# Altium PCB PCB1.PcbDoc
Units mm, origin at the board's own origin, x right, y up, seen from the top; angles counter-clockwise.
Board outline 95 x 95 mm, 2 copper layers (Top Layer, Bottom Layer); 53 components, 47 nets, 183 pads, 32 vias.
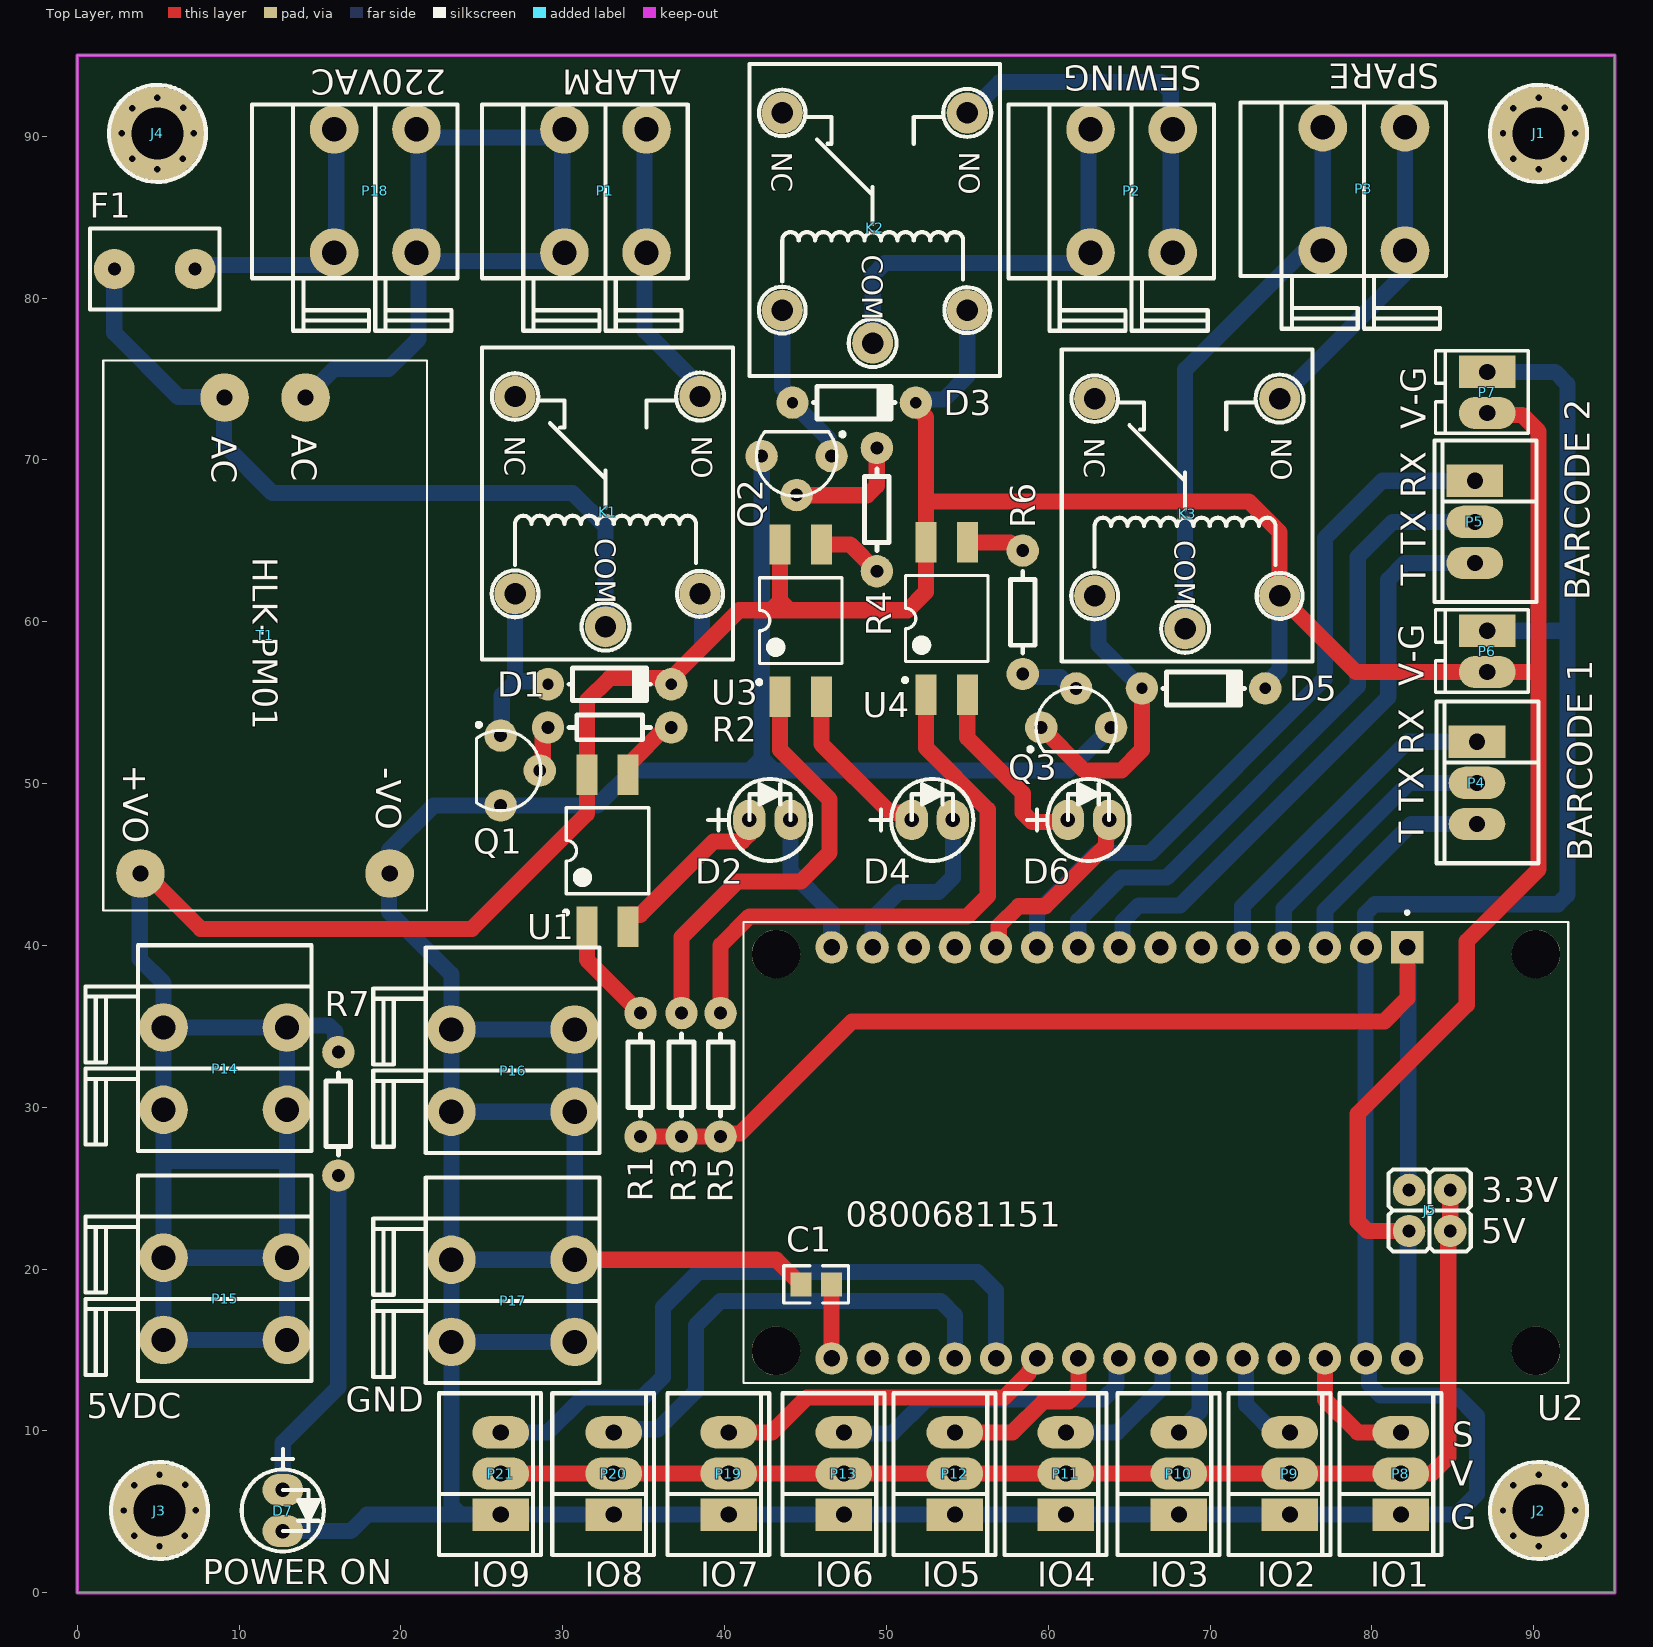
[diagram p0: Top Layer view]
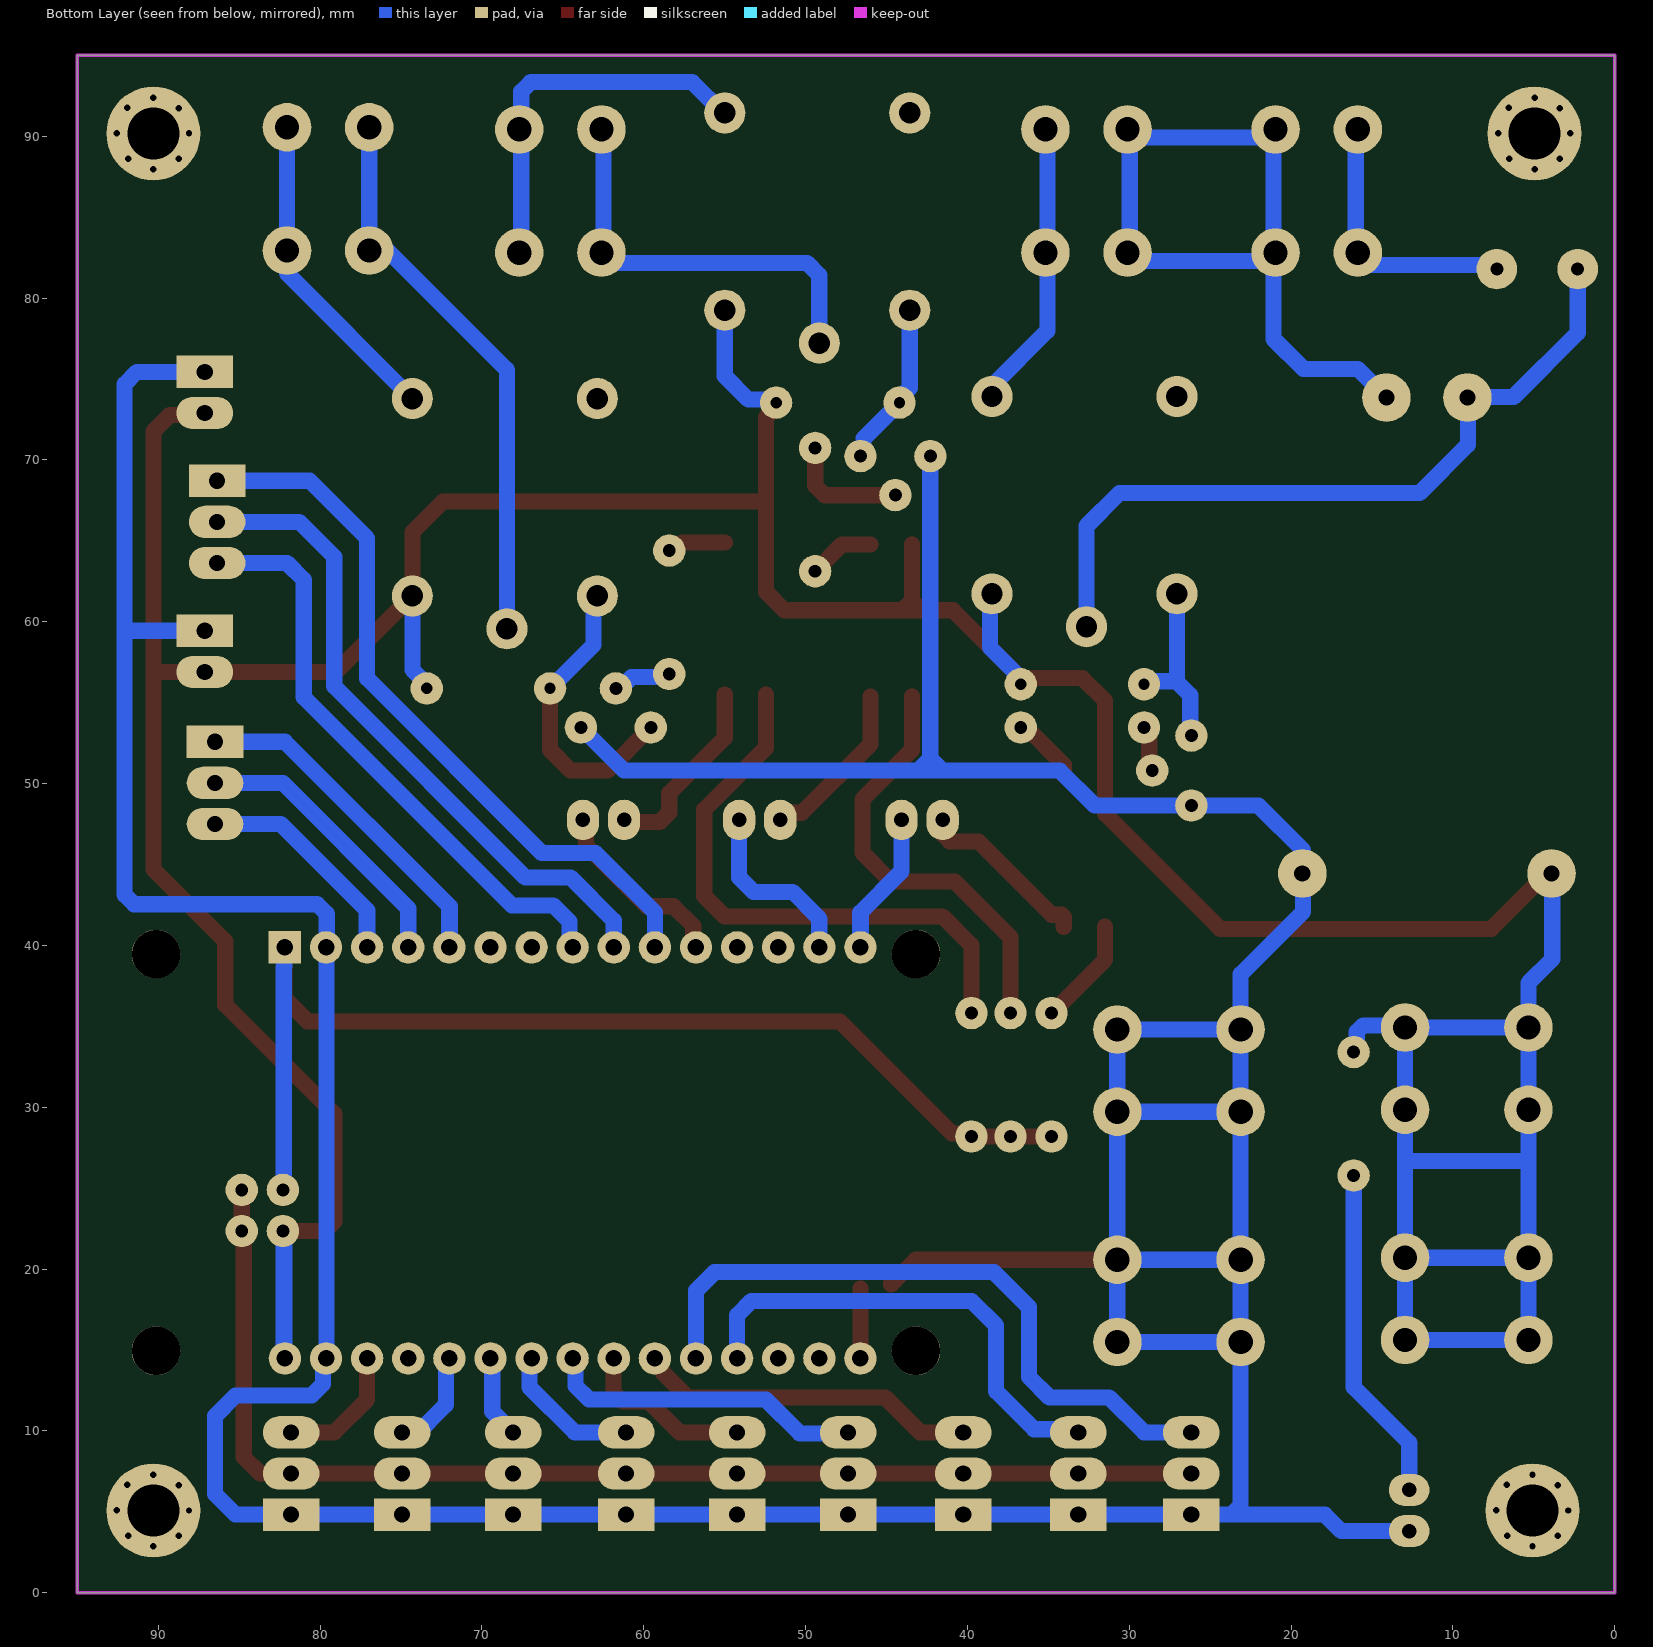
[diagram p1: Bottom Layer view, seen from below]
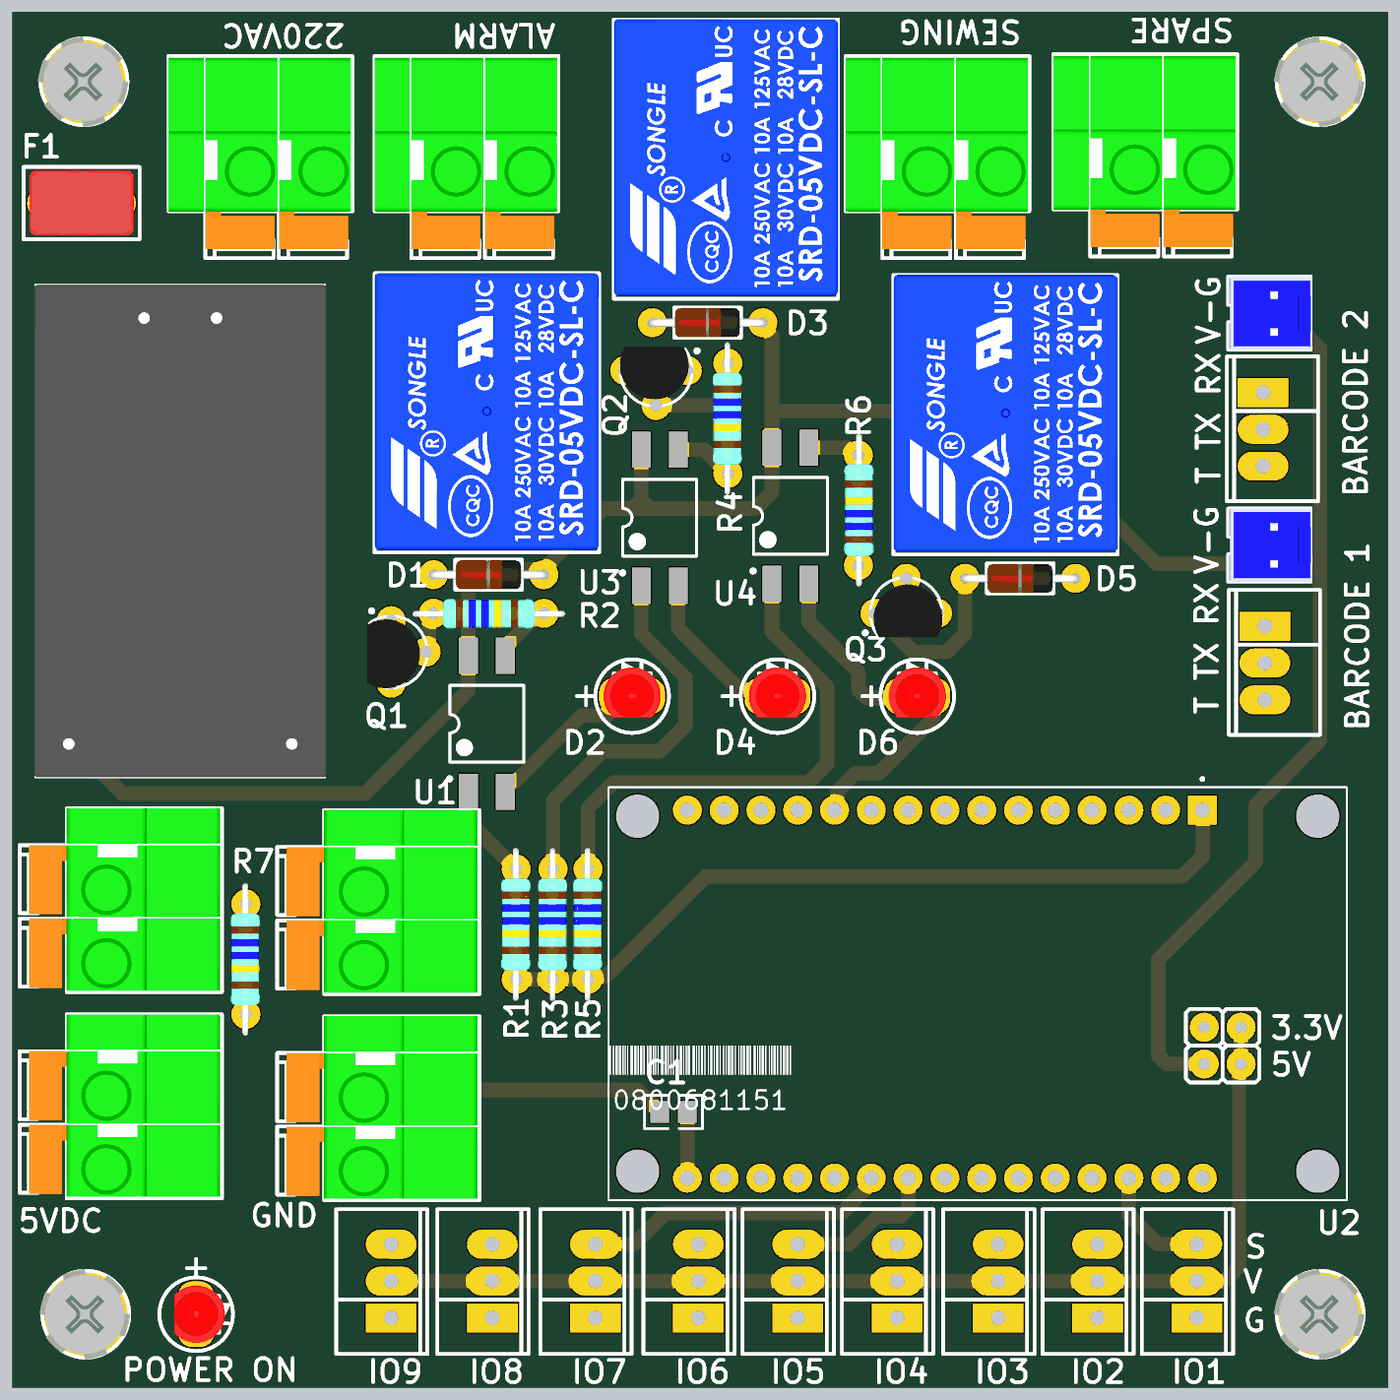
[diagram p2: 3D render of the assembled board from above, using the file's embedded part models]

## Layer stack, top to bottom
Top Solder: solder mask 0.0102, Solder Resist, Dk 3.5
Top Layer: signal copper 0.0356
Dielectric 1: dielectric 0.32, FR-4, Dk 4.8
Bottom Layer: signal copper 0.0356
Bottom Solder: solder mask 0.0102, Solder Resist, Dk 3.5

## Board outline
0,0 0,95 95,95 95,0

## Design rules (kind name [scope] priority, off if disabled: settings)
Clearance [All] p1: gap=0.254 ignorepadtopadclearanceinfootprint=FALSE except(0: Arc-Hole Track-Hole SMDPad-Hole THPad-Hole Via-Hole Fill-Hole Poly-Hole Region-Hole Text-Hole)
PolygonConnect [All] p1: connectstyle=Relief reliefconductorwidth=0.254 reliefentries=4 polygonreliefangle="90 Angle" airgapwidth=0.254
RoutingVias [All] p1: holewidth=0.711 width=1.27 viastyle="Through Hole" minholewidth=0.711 minwidth=1.27 maxholewidth=0.711 maxwidth=1.27
SolderMaskExpansion [All] p1: expansion=0.102 istentingtop=FALSE
Width [All] p1: maxlimit=1 minlimit=0.254 preferedwidth=0.6 minimp=50.000000 maximp=50.000000 favimp=50.000000
30 further rules are at their usual default settings.

## Components (designator, comment, footprint, x,y, rotation, side; value= is the part's Value field where it differs from the comment)
C1 "1n" CR2012-0805 45.655,19.05 r0 top
D1 "1N4148" D4148 29.083,56.134 r180 top
D2 "DO1" LED 42.799,47.752 r0 top
D3 "1N4148" D4148 44.196,73.533 r180 top
D4 "DO2" LED 52.832,47.752 r0 top
D5 "1N4148" D4148 65.786,55.88 r180 top
D6 "DO3" LED 62.484,47.752 r0 top
D7 "POWER ON" LED 12.7,5.08 r270 top
F1 "1A" CAP5W 7.286,81.758 r0 top
J1 "M3" PAD 90.297,90.17 r0 top
J2 "M3" PAD 90.297,5.08 r0 top
J3 "M3" PAD 5.08,5.08 r0 top
J4 "M3" PAD 4.953,90.17 r0 top
J5 "" sip2x2 82.296,22.352 r0 top
K1 "Relay" RELAY1CON_REV 32.639,59.69 r270 top
K2 "Relay" RELAY1CON_REV 49.149,77.216 r270 top
K3 "Relay" RELAY1CON_REV 68.453,59.563 r270 top
P1 "ALARM" KF142V-5.08-P2 30.099,82.804 r0 top
P2 "SEWING" KF142V-5.08-P2 62.611,82.804 r0 top
P3 "SPARE" KF142V-5.08-P2 76.962,82.931 r0 top
P4 "" CONNECT_W(3) 86.487,52.578 r270 top
P5 "" CONNECT_W(3) 86.36,68.707 r270 top
P6 "BARCODE1" CONNECT_2.54_(2) 87.122,59.436 r270 top
P7 "BARCODE2" CONNECT_2.54_(2) 87.122,75.438 r270 top
P8 "DI1" CONNECT_W(3) 81.788,4.826 r90 top
P9 "DI1" CONNECT_W(3) 74.93,4.826 r90 top
P10 "DI1" CONNECT_W(3) 68.072,4.826 r90 top
P11 "DI1" CONNECT_W(3) 61.087,4.826 r90 top
P12 "DI1" CONNECT_W(3) 54.229,4.826 r90 top
P13 "DI1" CONNECT_W(3) 47.371,4.826 r90 top
P14 "5VDC" KF142V-5.08-P2 5.334,34.925 r270 top
P15 "" KF142V-5.08-P2 5.334,20.701 r270 top
P16 "GND" KF142V-5.08-P2 23.114,34.798 r270 top
P17 "" KF142V-5.08-P2 23.114,20.574 r270 top
P18 "220VAC" KF142V-5.08-P2 15.875,82.804 r0 top
P19 "DI1" CONNECT_W(3) 40.259,4.826 r90 top
P20 "DI1" CONNECT_W(3) 33.147,4.826 r90 top
P21 "DI1" CONNECT_W(3) 26.162,4.826 r90 top
Q1 "BC547" TO-92 26.162,50.8 r180 top
Q2 "BC547" TO-92 44.45,70.231 r90 top
Q3 "BC547" TO-92 61.722,53.467 r270 top
R1 "100" R1/8 34.798,35.814 r270 top value=1K
R2 "500" R1/8 29.083,53.467 r0 top value=1K
R3 "100" R1/8 37.338,35.814 r270 top value=1K
R4 "500" R1/8 49.403,70.739 r270 top value=1K
R5 "100" R1/8 39.751,35.814 r270 top value=1K
R6 "500" R1/8 58.42,56.769 r90 top value=1K
R7 "100" R1/8 16.129,33.401 r270 top value=1K
T1 "AC-DC" HLK-PM01 11.604,59.15 r270 top
U1 "Optoisolator1" "DIP-4 - TOP" 32.766,45.847 r90 top
U2 "ESP32-DEVKIT-V1" ESP32_DEVKIT_V1 66.654,27.178 r270 top locked
U3 "Optoisolator1" "DIP-4 - TOP" 44.704,60.071 r90 top
U4 "Optoisolator1" "DIP-4 - TOP" 53.721,60.198 r90 top

## Footprints (in the part's own frame and the unit in brackets; to place one, negate y for a bottom-side part, rotate by r counter-clockwise, add the part's x,y. Pads: shape width x height; smd on the part's side, far side on the other; paste and mask are expansions set on the pad)
CAP5W [mm]
  round 2.5 hole 0.8: 1(0,0.03) 2(-5,0.03)
  silkscreen extent -6.5,-2.47 1.5,2.53, body extent -6.1,-2.2 1.1,2.3, height 5.75
CONNECT_2.54_(2) [mm]
  rect 2x3.5 hole 1: 1(0,0)
  oval 2x3.5 hole 1: 2(2.54,0)
  silkscreen extent -1.3,-3.2 3.8,2.54, body extent -1.27,-3.05 3.81,2.54, height 10.26
CONNECT_W(3) [mm]
  rect 2x3.5 hole 1: 1(0,0)
  oval 2x3.5 hole 1: 2(2.54,0) 3(5.08,0)
  silkscreen extent -2.5,-2.5 7.5,3.8
CR2012-0805 [mm]
  rect 1.3x1.5 smd: 1(-0.946,0) 2(0.954,0)
  silkscreen extent -2,-1.15 2,1.15, body extent -1.52,-0.7 1.52,0.7, height 0.76
D4148 [mm]
  round 2 hole 0.7: A(0,0) K(-7.62,0)
  silkscreen extent -6.32,-1.02 -1.3,1.02, body extent -7.88,-1 0.28,1, height 2.09
"DIP-4 - TOP" [mm] "DIP; 4 Leads; Row Spacing 7.62 mm; Pitch 2.54 mm"
  rect 2.5x1.3 smd: 1(-4.7,1.275) 2(-4.7,-1.275) 3(4.7,-1.275) 4(4.7,1.275)
  silkscreen extent -3.93,-2.55 2.65,2.69, body extent -3.15,-2.5 3.15,2.5, height 5.6
ESP32_DEVKIT_V1 [mm]
  rect 2x2 / inner round 2 / far side rect 2x2 hole 1.02: 1(-12.7,15.515)
  round 2 hole 1.02: 2(-12.7,12.975) 3(-12.7,10.435) 4(-12.7,7.895) 5(-12.7,5.355) 6(-12.7,2.815) 7(-12.7,0.275) 8(-12.7,-2.265) 9(-12.7,-4.805) 10(-12.7,-7.345) 11(-12.7,-9.885) 12(-12.7,-12.425) 13(-12.7,-14.965) 14(-12.7,-17.505) 15(-12.7,-20.045) 16(12.7,-20.045) 17(12.7,-17.505) 18(12.7,-14.965) 19(12.7,-12.425) 20(12.7,-9.885) 21(12.7,-7.345) 22(12.7,-4.805) 23(12.7,-2.265) 24(12.7,0.275) 25(12.7,2.815) 26(12.7,5.355) 27(12.7,7.895) 28(12.7,10.435) 29(12.7,12.975) 30(12.7,15.515)
  round 3 hole 3 unplated: ""(-12.28,23.475) ""(-12.28,-23.475) ""(12.23,23.475) ""(12.23,-23.475)
  silkscreen extent -14.95,-25.48 14.23,25.48, body extent -14.2,-25.65 14.1,25.85, height 15
HLK-PM01 [mm]
  round 3 hole 1: 1(-14.7,2.5) 2(-14.7,-2.5) 3(14.7,7.7) 4(14.7,-7.7)
  silkscreen extent -17,-10 17,10, body extent -17,-10.1 17,10.1, height 15
KF142V-5.08-P2 [mm]
  round 3 hole 1.5: 1(0,0) 1(0,7.62) 2(5.08,0) 2(5.08,7.62)
  silkscreen extent -5.08,-4.83 7.62,9.14, body extent -5.08,-4.18 7.52,9.02, height 14.1
LED [mm]
  oval 2x2.5 hole 0.9: 1(-1.27,0) 2(1.27,0)
  silkscreen extent -3.81,-2.54 2.54,2.54, body extent -1.99,-1.5 1.99,1.99, height 5.38
PAD [mm]
  round 5.8 hole 3.2: 0(0,0)
  silkscreen extent -3,-3 3,3, body extent -4.38,-4.32 4.25,4.31, height 1
R1/8 [mm]
  round 2 hole 0.8: 1(0,0) 2(7.62,0)
  silkscreen extent 1.3,-0.76 6.35,0.76, body extent -1.46,-1.05 9.11,0.98, height 2.29
RELAY1CON_REV [mil]
  round 100 hole 52: 1(0,0) 2(-560,-220) 3(-560,230) 4(-80,230) 5(-80,-220)
  silkscreen extent -679,-300 80,310, body extent -680,-300 72,310, height 606
sip2x2 [mm]
  round 2 hole 0.8: 1(0,0) 2(2.54,0) 3(0,2.54) 4(2.54,2.54)
  silkscreen extent -1.27,-1.27 3.81,3.81
TO-92 [mm]
  round 2 hole 0.8: 1(0,-2.159) 2(-2.413,0) 3(0,2.159)
  silkscreen extent -2.48,-2.95 1.5,2.48, body extent -2,-2.25 1.65,2.51, height 7.62

## Part data
C1: library part Cap, "Capacitor", LatestRevisionDate=17-Jul-2002, LatestRevisionNote="Re-released for DXP Platform.", PackageDescription="Radial Cap, Thru-Hole; 2 Leads; 0.3 in Pin Spacing", PackageReference=RAD-0.3, Published=8-Jun-2000, Publisher="Altium Limited"
D1 D3 D5: library part Diode, "Default Diode", Code_JEDEC=DO-214-AB, LatestRevisionDate=17-Jul-2002, LatestRevisionNote="Re-released for DXP Platform.", PackageDescription="DO-214-AB/SMC; 2 C-Bend Leads; Body 7.9 x 5.9 mm, inc. leads (LxW)", PackageReference=SMC, PackageVersion=Sep-1996, Published=8-Jun-2000, Publisher="Altium Limited"
D2 D4 D6 D7: library part LED0, "Typical INFRARED GaAs LED", LatestRevisionDate=08-Jul-2005, LatestRevisionNote="Mech Layer 1 removed.", PackageDescription="LED; 2 Leads", PackageReference=LED-0, Published=8-Jun-2000, Publisher="Altium Limited"
F1: library part "Fuse 2", "Fuse", LatestRevisionDate=17-Jul-2002, LatestRevisionNote="Re-released for DXP Platform.", PackageDescription="Thru-Hole; 2 Leads", PackageReference=PIN-W2/E2.8, Published=8-Jun-2000, Publisher="Altium Limited"
J1 J2 J3 J4: library part Socket, "Socket", LatestRevisionDate=17-Jul-2002, LatestRevisionNote="Re-released for DXP Platform.", Publisher="Altium Limited"
J5: library part SW-DPST, "Double-Pole, Single-Throw Switch", LatestRevisionDate=17-Jul-2002, LatestRevisionNote="Re-released for DXP Platform.", PackageDescription="Switch; 4 Leads", PackageReference=DPST-4, Published=24-Mar-1999, Publisher="Altium Limited"
K1 K2 K3: "SPDT Relay", LatestRevisionDate=17-Jul-2002, LatestRevisionNote="Re-released for DXP Platform.", PackageReference=MODULE5B, Published=8-Jun-2000, Publisher="Altium Limited"
P1 P2 P3 P6 P7 P14 P15 P16 P17 P18: library part "Header 2", "Header, 2-Pin", LatestRevisionDate=17-Jul-2002, LatestRevisionNote="Re-released for DXP Platform.", Publisher="Altium Limited"
P4 P5 P8 P9 P10 P11 P12 P13 P19 P20 P21: library part "Header 3", "Header, 3-Pin", LatestRevisionDate=17-Jul-2002, LatestRevisionNote="Re-released for DXP Platform.", Publisher="Altium Limited"
Q1 Q2 Q3: library part 2N3904, "NPN General Purpose Amplifier", ComponentLink1Description="Manufacturer Link", ComponentLink1URL=http://www.fairchildsemi.com/, ComponentLink2Description=Datasheet, ComponentLink2URL=http://www.fairchildsemi.com/ds/2N%2F2N3904.pdf, DatasheetVersion=1997, LatestRevisionDate=15-Jan-2003, LatestRevisionNote="PCB Footprint 'BCY-W3/D4.7' replaced", PackageDescription="TO, Flat Index; 3 In-Line, Axial Leads; Body Dia. 4.5mm; Leads 0.51 x 0.48 mm (max)", PackageReference=TO-92A, PackageVersion=Sep-1998, Published=8-Jun-2000, Publisher="Altium Limited"
R1 R2 R3 R4 R5 R6 R7: library part Res1, "Resistor", LatestRevisionDate=17-Jul-2002, LatestRevisionNote="Re-released for DXP Platform.", PackageDescription="Axial Device, Thru-Hole; 2 Leads; 0.3 in Pin Spacing", PackageReference=AXIAL-0.3, Published=8-Jun-2000, Publisher="Altium Limited"
T1: library part Trans, "Transformer", LatestRevisionDate=08-Jul-2005, LatestRevisionNote="Mech Layer 1 removed.", PackageDescription="Transformer; 4 Leads", PackageReference=TRANS, Published=24-Mar-1999, Publisher="Altium Limited"
U1 U3 U4: "4-Pin Phototransistor Optocoupler", DatasheetVersion=Nov-2003, LatestRevisionDate=04-Mar-2005, LatestRevisionNote="Sch pins 3 & 4 Swapped.", PackageReference=DIP-4, Published=24-Mar-1999, Publisher="Altium Limited"
U2: "Dual core, Wi-Fi: 2.4 GHz up to 150 Mbits/s,BLE (Bluetooth Low Energy) and legacy Bluetooth, 32 bits, Up to 240 MHz"

## Via types
v1: diameter 1, hole 0.4, Top Layer to Bottom Layer, 32 vias

## Nets (pads, with @x,y where several pads share a name; then routed paths per layer and width w, separated by ;. In a path a pad name is that pad's centre, name@x,y a point inside that pad or via, vN(x,y) a via of type N, cw(c..) or ccw(c..) an arc to the next point about the centre after c; other vN are vias at no path point)
3V3: J5.3 R1.2 R3.2 R5.2 U2.1 | length 66.8
  Top Layer w1: R1.2 R3.2 R5.2 39.942,28.385 40.958,28.385 47.879,35.306 80.772,35.306 82.19,36.724 82.19,38.735
  Bottom Layer w1: 82.19,38.735 82.243,38.682 82.243,24.945 J5.3
5V: D1.K D3.K D5.K J5.1 K1.4 K2.4 K3.4 P6.2 P7.2 P14.1 P14.2 P15.1 P15.2 R7.1 T1.4 U1.4 U2.30 U3.4 U4.4 | length 305.8
  Top Layer w1: T1.4 4.191,44.45 7.62,41.021 24.384,41.021 31.491,48.128 U1.4 31.491,55.113 32.893,56.515 36.703,56.515 40.894,60.706 42.843,60.706 ; U3.4 43.429,61.292 ; D3.K 51.816,73.262 52.446,72.632 52.446,67.437 ; U2.30@82.149,14.312 U2.30@82.34,14.121 ; J5.1 79.707,22.352 79.121,22.938 79.121,29.591 85.852,36.322 85.852,40.259 90.297,44.704 90.297,56.896 ; P7.2 87.249,72.771 89.281,72.771 90.297,71.755 90.297,56.896 ; 42.843,60.706 44.015,60.706 ; 42.843,60.706 43.429,61.292 ; 43.429,61.292 44.015,60.706 ; 44.015,60.706 51.308,60.706 52.446,61.844 U4.4 52.446,67.437 ; 52.446,67.437 72.39,67.437 74.295,65.532 K3.4 78.994,56.896 P6.2 90.297,56.896
  Bottom Layer w1: T1.4@3.857,44.45 3.857,39.151 5.334,37.674 P14.1@5.334,34.925 ; R7.1@15.938,33.21 R7.1 15.938,33.592 15.938,34.658 15.543,35.052 13.081,35.052 P14.1@12.954,34.925 ; D1.K@36.703,56.515 38.608,58.42 38.608,62.23 K1.4@38.481,62.357 ; D3.K 52.007,73.724 53.531,73.724 54.991,75.184 K2.4 ; D5.K 73.406,56.151 74.295,57.04 K3.4 ; U2.30@82.149,14.312 U2.30@82.202,14.365 ; U2.30@82.202,14.312 U2.30@82.202,14.365 ; J5.1@82.202,22.261 U2.30@82.202,14.365 ; U2.30@82.243,14.35 82.243,22.299 J5.1 ; P15.1@5.334,20.701 P15.1@12.954,20.701 ; P15.1@5.334,20.701 5.334,15.621 12.954,15.621 P15.1@12.954,20.701 ; P15.1@5.334,20.701 5.334,26.67 ; 5.334,26.67 5.334,29.845 P14.1@5.334,34.925 ; 5.334,26.67 12.954,26.67 ; P14.1@5.334,34.925 P14.1@12.954,34.925 ; P15.1@12.954,20.701 12.954,26.67 ; 12.954,26.67 12.954,29.845 P14.1@12.954,34.925
alarm: D2.2 U2.15 | length 9.6
  Bottom Layer w1: D2.2@44.069,46.863 44.069,44.577 46.63,42.016 U2.15@46.63,40.424 ; U2.15@46.589,39.878 46.589,41.978
cutoff_sewing: D4.2 U2.14 | length 11.7
  Bottom Layer w1: U2.14@49.129,39.878 49.129,41.639 ; U2.14@49.17,40.424 49.17,41.677 50.8,43.307 53.213,43.307 54.102,44.196 D4.2@54.102,46.863
DO_SPARE: D6.2 U2.11 | length 11
  Top Layer w1: U2.11@56.749,39.712 56.94,39.903 56.94,41.195 ; 56.981,41.233 58.166,42.418 59.817,42.418 63.563,46.164 63.563,46.672 D6.2@63.754,46.863
GND: C1.1 D7.2 P6.1 P7.1 P8.1 P9.1 P10.1 P11.1 P12.1 P13.1 P16.1 P16.2 P17.1 P17.2 P19.1 P20.1 P21.1 Q1.3 Q2.3 Q3.3 T1.3 U2.2 U2.29 | length 347.6
  Top Layer w1: P17.1@30.734,20.574 43.185,20.574 44.459,19.3 44.559,19.3 44.709,19.15 C1.1
  Bottom Layer w1: D7.2@12.891,4.001 D7.2 16.891,3.81 17.907,4.826 23.7,4.826 ; Q2.3 42.291,51.562 ; Q3.3 61.214,50.8 43.053,50.8 ; U2.29@79.459,14.159 U2.29@79.65,14.35 ; U2.29@79.609,14.312 79.609,39.712 79.588,39.733 79.588,41.959 80.174,42.545 91.489,42.545 92.075,43.131 92.075,59.309 ; U2.29 79.82,14.287 79.82,12.89 80.518,12.192 85.217,12.192 86.487,10.922 86.487,6.096 85.217,4.826 P8.1 P9.1 P10.1 P11.1 P12.1 P13.1 P19.1 P20.1 P21.1 23.7,4.826 ; P6.1 91.948,59.436 92.075,59.309 ; P7.1 91.313,75.438 92.075,74.676 92.075,59.309 ; P17.2@23.114,15.494 23.114,5.412 23.7,4.826 ; P17.2@23.114,15.494 30.734,15.494 P17.1@30.734,20.574 ; P17.2@23.114,15.494 P17.1@23.114,20.574 ; P17.1@23.114,20.574 P17.1@30.734,20.574 ; P17.1@23.114,20.574 P16.2@23.114,29.718 ; P16.2@23.114,29.718 P16.2@30.734,29.718 ; P16.2@23.114,29.718 P16.1@23.114,34.798 ; P16.1@23.114,34.798 30.734,34.798 P16.2@30.734,29.718 ; P16.1@23.114,34.798 23.114,38.22 19.257,42.077 19.257,45.879 22.019,48.641 Q1.3 32.131,48.641 34.29,50.8 41.529,50.8 ; P17.1@30.734,20.574 P16.2@30.734,29.718 ; 41.529,50.8 43.053,50.8 ; 41.529,50.8 42.291,51.562 ; 42.291,51.562 43.053,50.8
IO1: P8.3 U2.28 | length 8.1
  Top Layer w1: U2.28 77.089,11.938 79.121,9.906 P8.3
IO2: P9.3 U2.26 | length 5.6
  Bottom Layer w1: U2.26@72.03,14.35 72.221,14.159 72.221,11.61 P9.3@74.18,9.651
IO3: P10.3 U2.25 | length 5.4
  Bottom Layer w1: P10.3 69.363,11.197 69.363,14.245 U2.25@69.723,14.605
IO4: P11.3 U2.24 | length 8.8
  Bottom Layer w1: P11.3 64.263,9.906 67.056,12.699 67.056,14.244 U2.24@66.95,14.35
IO5: P12.3 U2.22 | length 10.7
  Top Layer w1: P12.3 57.786,9.906 59.69,11.81 61.284,11.81 61.87,12.396 61.87,14.35 U2.22@61.849,14.371
IO6: P13.3 U2.23 | length 19.7
  Bottom Layer w1: P13.3 47.435,9.842 50.356,9.842 52.451,11.937 63.373,11.937 64.219,12.783 64.219,14.159 U2.23@64.41,14.35
IO7: P19.3 U2.21 | length 21.9
  Top Layer w1: P19.3 42.926,9.906 45.085,12.065 57.285,12.065 58.809,13.589 58.809,13.707 59.309,14.207 U2.21
  Bottom Layer w1: P19.3 P19.3@41.009,9.906
IO8: P20.3 U2.19 | length 29.9
  Bottom Layer w1: P20.3 33.338,10.097 35.878,10.097 38.227,12.446 38.227,16.51 39.751,18.034 53.34,18.034 54.229,17.145 U2.19
IO9: P21.3 U2.20 | length 41.9
  Bottom Layer w1: P21.3 29.083,9.906 31.242,12.065 34.925,12.065 36.195,13.335 36.195,17.653 38.354,19.812 55.626,19.812 56.769,18.669 U2.20
L: F1.2 K1.1 T1.2 | length 45.8
  Bottom Layer w1: F1.2 2.286,77.851 6.255,73.882 9.072,73.882 T1.2 ; T1.2@9.072,73.12 9.072,70.938 12.065,67.945 30.607,67.945 32.639,65.913 K1.1@32.639,60.325
N: P1.1 P18.2 T1.1 | length 46.3
  Bottom Layer w1: T1.1 15.874,75.62 19.232,75.62 21.082,77.47 P18.2@21.082,82.296 ; P18.2@21.082,82.296 21.082,89.916 29.972,89.916 29.972,82.296 P18.2@21.082,82.296
NetC1_2: C1.2 U2.16 | length 3.8
  Top Layer w1: U2.16@46.609,14.986 C1.2@46.609,18.8
NetD1_A: D1.A K1.5 Q1.1 | length 12.2
  Bottom Layer w1: Q1.1 26.232,53.029 26.232,55.459 27.051,56.278 ; K1.5@27.051,62.357 27.051,56.278 ; D1.A@28.812,56.261 D1.A@29.083,56.261 ; D1.A@29.083,56.515 28.892,56.324 27.097,56.324 27.051,56.278
NetD2_1: D2.1 U1.2 | length 10.2
  Top Layer w1: U1.2 34.041,41.747 34.191,41.897 34.791,41.897 39.316,46.422 41.088,46.422 D2.1@41.529,46.863
NetD3_A: D3.A K2.5 Q2.1 | length 10.3
  Bottom Layer w1: K2.5 43.561,74.439 44.196,73.804 D3.A 46.418,71.311 46.418,70.422 Q2.1
NetD4_1: D4.1 U3.2 | length 11
  Top Layer w1: U3.2 45.979,52.446 50.232,48.193 51.1,48.193 51.308,47.985 D4.1@51.308,47.117
NetD5_A: D5.A K3.5 Q3.1 | length 18.6
  Top Layer w1: Q3.1 62.23,50.8 64.516,50.8 65.786,52.07 D5.A
  Bottom Layer w1: K3.5 63.112,61.348 63.112,58.554 D5.A
NetD6_1: D6.1 U4.2 | length 11.5
  Top Layer w1: U4.2 54.996,52.827 58.42,49.403 58.42,48.211 59.006,47.625 D6.1@60.996,47.625
NetD7_1: D7.1 R7.2 | length 20.9
  Bottom Layer w1: D7.1 12.7,9.271 16.129,12.7 R7.2
NetF1_1: F1.1 P18.1 | length 16.5
  Bottom Layer w1: F1.1 7.54,82.042 15.748,82.042 16.002,82.296 P18.1@16.002,89.916
NetJ5_2: J5.2 J5.4 P8.2 P9.2 P10.2 P11.2 P12.2 P13.2 P19.2 P20.2 P21.2 | length 75.9
  Top Layer w1: P21.2@25.781,7.366 P20.2 P19.2 P13.2 P12.2 P11.2 P10.2 P9.2 P8.2 83.693,7.366 84.709,8.382 84.709,22.225 J5.2 J5.4
NetK1_3: K1.3 P1.2 | length 16.8
  Bottom Layer w1: P1.2@35.052,89.916 35.052,82.296 35.052,77.978 K1.3@38.481,74.549
NetK2_1: K2.1 P2.1 | length 25.8
  Bottom Layer w1: K2.1 49.149,81.407 49.911,82.169 62.484,82.169 P2.1@62.484,90.102
NetK2_3: K2.3 P2.2 | length 24.3
  Bottom Layer w1: K2.3 55.098,91.44 57.003,93.345 66.978,93.345 67.564,92.759 P2.2@67.564,82.062
NetK3_1: K3.1 P3.1 | length 35.5
  Bottom Layer w1: K3.1 68.453,75.565 P3.1@76.835,83.947 ; P3.1@76.962,82.931 P3.1@76.962,90.551
NetK3_3: K3.3 P3.2 | length 19.6
  Bottom Layer w1: K3.3 82.042,81.534 P3.2@82.042,90.185
NetQ1_2: Q1.2 R2.1 | length 3
  Top Layer w1: Q1.2 28.766,50.991 28.766,53.007 29.083,53.323 R2.1@29.083,53.594
NetQ2_2: Q2.2 R4.1 | length 7.5
  Top Layer w1: Q2.2 48.817,67.818 49.403,68.404 R4.1
NetQ3_2: Q3.2 R6.1 | length 3.7
  Bottom Layer w1: R6.1 58.611,56.578 60.754,56.578 61.451,55.88 Q3.2
NetR1_1: R1.1 U1.1 | length 6.7
  Top Layer w1: U1.1 31.491,39.121 R1.1
NetR2_2: R2.2 U1.3 | length 4.3
  Top Layer w1: U1.3 34.041,51.147 36.488,53.594 R2.2@36.703,53.594
NetR3_1: R3.1 U3.1 | length 26.9
  Top Layer w1: R3.1 37.338,40.513 40.767,43.942 44.704,43.942 46.482,45.72 46.482,49.022 43.429,52.075 U3.1
NetR4_2: R4.2 U3.3 | length 4.1
  Top Layer w1: U3.3 47.751,64.771 R4.2
NetR5_1: R5.1 U4.1 | length 36
  Top Layer w1: R5.1 39.751,40.005 41.529,41.783 54.991,41.783 56.261,43.053 56.261,48.387 52.446,52.202 U4.1
NetR6_2: R6.2 U4.3 | length 3.6
  Top Layer w1: U4.3 57.64,64.898 58.149,64.389 R6.2
RX_BAR1: P4.1 U2.5 | length 22.9
  Bottom Layer w1: U2.5@71.989,39.878 71.989,42.401 ; U2.5@72.03,40.424 72.03,42.439 82.169,52.578 P4.1@86.233,52.578
RX_BAR2: P5.1 U2.10 | length 45.3
  Bottom Layer w1: U2.10 59.309,42.037 62.981,45.709 66.305,45.709 77.089,56.494 77.089,65.151 80.645,68.707 P5.1
trig_barcode1: P4.3 U2.3 | length 15.4
  Bottom Layer w1: U2.3@77.069,39.878 77.069,42.147 ; U2.3@77.11,40.424 77.11,42.185 82.423,47.498 P4.3@86.233,47.498
trig_barcode2: P5.3 U2.8 | length 36.9
  Bottom Layer w1: U2.8 64.58,40.069 64.58,41.466 65.585,42.471 68.146,42.471 81.01,55.335 81.01,62.595 82.042,63.627 P5.3
TX_BAR1: P4.2 U2.4 | length 19.4
  Bottom Layer w1: U2.4@74.529,39.624 74.529,42.274 ; U2.4@74.57,40.424 74.57,42.312 82.296,50.038 P4.2@86.233,50.038
TX_BAR2: P5.2 U2.9 | length 41.1
  Bottom Layer w1: U2.9 61.849,41.529 64.516,44.196 67.31,44.196 79.121,56.007 79.121,64.008 81.28,66.167 P5.2
pads on no net: J1.0 J2.0 J3.0 J4.0 K1.2 K2.2 K3.2 U2. U2.6 U2.7 U2.12 U2.13 U2.17 U2.18 U2.27
copper on no net:
  other v1: 5.08,2.88 90.297,2.88 3.524,3.524 6.636,3.524 88.741,3.524 91.853,3.524 2.88,5.08 88.097,5.08 7.33,5.105 92.547,5.105 3.524,6.636 88.741,6.636 6.686,6.661 91.903,6.661 5.08,7.28 90.297,7.28 4.953,87.97 90.297,87.97 3.397,88.614 6.509,88.614 88.741,88.614 91.853,88.614 2.753,90.17 88.097,90.17 7.203,90.195 92.547,90.195 3.397,91.726 88.741,91.726 6.559,91.751 91.903,91.751 4.953,92.37 90.297,92.37

## Keep-outs
Keep-Out Layer:
  the board outline again, w0.2

## Silkscreen, mask and mechanical layers (free items; w line width, h text height)
Top Overlay:
  text "V-G" at 83.312,71.882 h1.52 r90
  text "T TX RX" at 83.312,62.23 h1.52 r90
  text "BARCODE 2" at 93.472,61.341 h1.52 r90
  text "V-G" at 83.185,56.007 h1.52 r90
  text "T TX RX" at 83.185,46.355 h1.52 r90
  text "BARCODE 1" at 93.599,45.212 h1.52 r90
  text "3.3V" at 86.741,24.13 h1.52
  text "0800681151" at 47.498,22.623 h1.52
  text "5V" at 86.741,21.59 h1.52
  text "S" at 84.963,9.017 h1.52
  text "V" at 84.836,6.604 h1.52
  text "G" at 84.836,3.937 h1.52
  text "IO9" at 24.384,0.381 h1.52
  text "IO8" at 31.369,0.381 h1.52
  text "IO7" at 38.481,0.381 h1.52
  text "IO6" at 45.593,0.381 h1.52
  text "IO5" at 52.197,0.381 h1.52
  text "IO4" at 59.309,0.381 h1.52
  text "IO3" at 66.294,0.381 h1.52
  text "IO2" at 72.898,0.381 h1.52
  text "IO1" at 79.883,0.381 h1.52
Mechanical 1:
  lines w0.8: 34.798,58.039 35.687,58.928 35.687,67.183 41.529,73.025 41.529,75.946 39.751,77.724 39.751,92.71 ; 0,0 95,0 95,95 0,95 0,0

## Text inside footprints (layer, text, board x,y; h text height)
K1: Top Overlay "NO" at 37.973,71.501 h1.27 r270; Top Overlay "NC" at 26.416,71.501 h1.27 r270; Top Overlay "COM" at 32.004,65.151 h1.27 r270
K2: Top Overlay "NO" at 54.483,89.027 h1.27 r270; Top Overlay "NC" at 42.926,89.027 h1.27 r270; Top Overlay "COM" at 48.514,82.677 h1.27 r270
K3: Top Overlay "NO" at 73.787,71.374 h1.27 r270; Top Overlay "NC" at 62.23,71.374 h1.27 r270; Top Overlay "COM" at 67.818,65.024 h1.27 r270
T1: Top Overlay "AC" at 13.255,71.596 h1.52 r270; Top Overlay "AC" at 8.302,71.469 h1.52 r270; Top Overlay "-VO" at 18.462,51.022 h1.52 r270; Top Overlay "+VO" at 2.841,51.149 h1.52 r270; Top Overlay "HLK-PM01" at 10.842,63.976 h1.52 r270